# EAGLE board Print Panel (EAGLE 9.6.1)
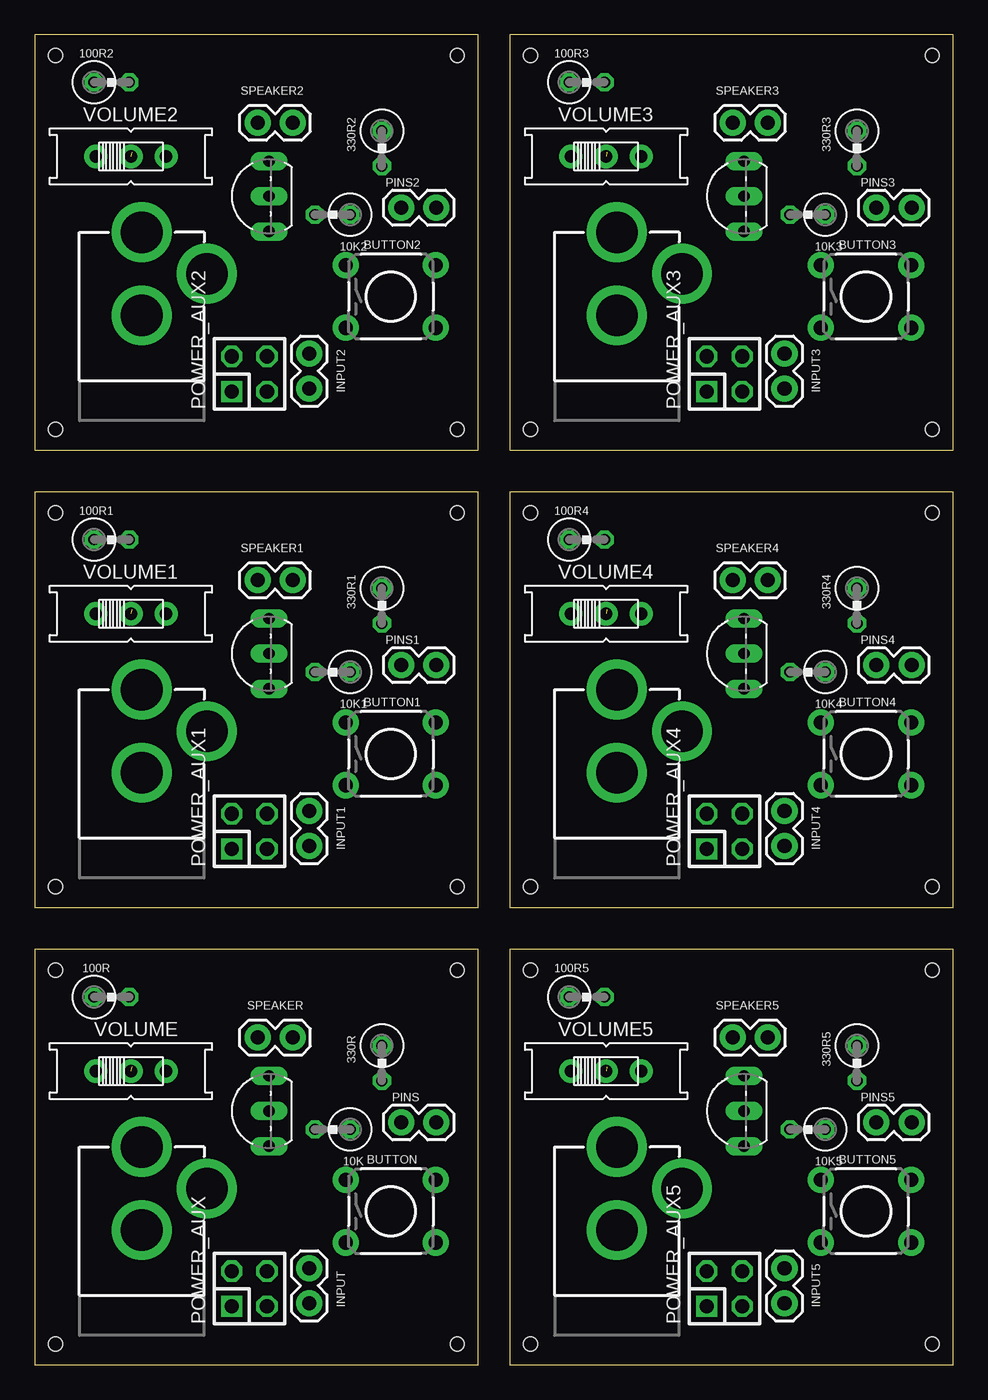
[diagram p0: board, top side]
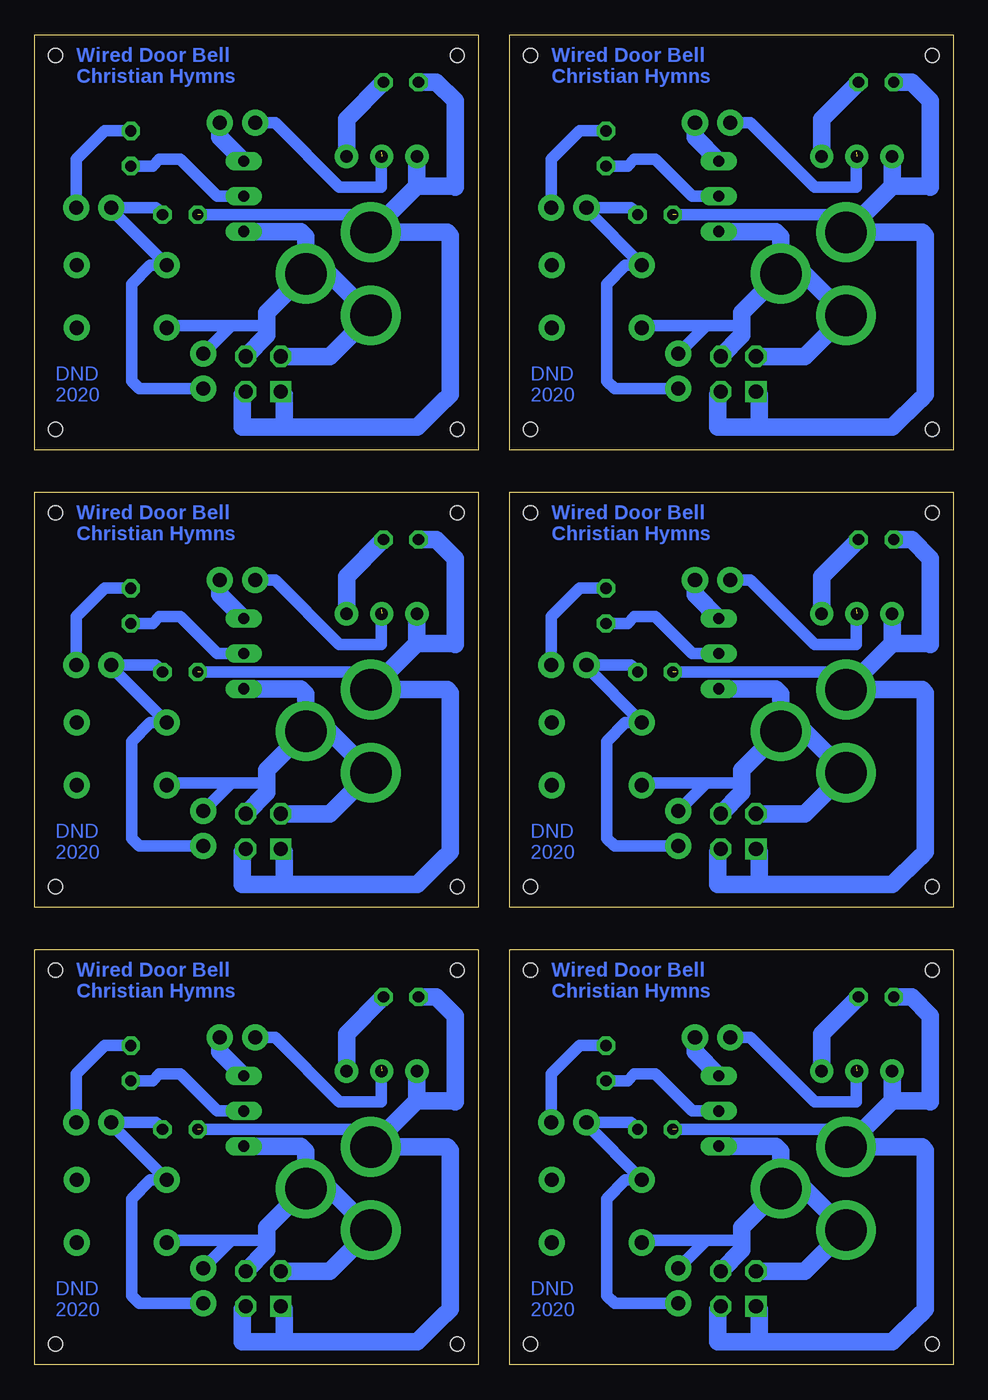
[diagram p1: board, bottom side, seen from below]

Size 66.29 x 96.04 mm. Coordinates in mm from the lower left corner, seen from the top.
Outline: 0,0 32,0 32,30 0,30 0,0
Outline: 0,33.02 32,33.02 32,63.02 0,63.02 0,33.02
Outline: 0,66.04 32,66.04 32,96.04 0,96.04 0,66.04
Outline: 34.29,66.04 66.29,66.04 66.29,96.04 34.29,96.04 34.29,66.04
Outline: 34.29,33.02 66.29,33.02 66.29,63.02 34.29,63.02 34.29,33.02
Outline: 34.29,0 66.29,0 66.29,30 34.29,30 34.29,0
Copper layers (1*16): Top 0.035mm / dielectric 1.5mm / Bottom 0.035mm
Design rules "default": minimum track width 6mil, minimum drill 0.35mm, track to track 6mil, track to pad 6mil, pad to pad 6mil, via to via 6mil, smd to smd 6mil, copper to edge 40mil, drill to drill 6mil, minimum pad ring 10mil, minimum via ring 8mil, stop-mask expansion 4mil, vias tented up to drill 0mil, thermal gap 10mil
Holes 1 mm at 1.5,1.5 30.5,28.5 30.5,1.5 1.5,28.5 1.5,34.52 30.5,61.52 30.5,34.52 1.5,61.52 1.5,67.54 30.5,94.54 30.5,67.54 1.5,94.54 35.79,67.54 64.79,94.54 64.79,67.54 35.79,94.54 35.79,34.52 64.79,61.52 64.79,34.52 35.79,61.52 35.79,1.5 64.79,28.5 64.79,1.5 35.79,28.5

## Footprints (pad centres in the part's own frame; a part is rotated, then mirrored left to right if it is on the bottom)
0309V = drill 0.813 octagon: 1 -1.27,0; 2 1.27,0
TACTILE_SWITCH_PTH_6.0MM = drill 1.016 pad 1.88: 1 -3.251,2.261; 2 3.251,2.261; 3 -3.251,-2.261; 4 3.251,-2.261
1X02 = drill 1.016 pad 1.88: 1 0,0; 2 2.54,0
POWER_JACK_PTH = drill 2.997 pad 4.318: GND 0,7.7; GNDBREAK 4.7,10.7; PWR 0,13.7
DIL-100-2X02 = drill 1.016 square: 1 -1.27,-1.27 | drill 1.016 octagon: 2 -1.27,1.27; 3 1.27,-1.27; 4 1.27,1.27
TO92-EBC-OVAL = drill 0.813 long: B 0,-1.27; C 2.54,-1.27; E -2.54,-1.27
EG1218 = drill 0.9 pad 1.676: O -2.54,0; P 0,0; S 2.54,0

## Placement (x,y rotation side)
10K  10k  [0309V]  21.5,17 180 top
10K1  10k  [0309V]  21.5,50.02 180 top
10K2  10k  [0309V]  21.5,83.04 180 top
10K3  10k  [0309V]  55.79,83.04 180 top
10K4  10k  [0309V]  55.79,50.02 180 top
10K5  10k  [0309V]  55.79,17 180 top
100R  100  [0309V]  5.56,26.56 0 top
100R1  100  [0309V]  5.56,59.58 0 top
100R2  100  [0309V]  5.56,92.6 0 top
100R3  100  [0309V]  39.85,92.6 0 top
100R4  100  [0309V]  39.85,59.58 0 top
100R5  100  [0309V]  39.85,26.56 0 top
330R  330  [0309V]  25.06,21.78 270 top
330R1  330  [0309V]  25.06,54.8 270 top
330R2  330  [0309V]  25.06,87.82 270 top
330R3  330  [0309V]  59.35,87.82 270 top
330R4  330  [0309V]  59.35,54.8 270 top
330R5  330  [0309V]  59.35,21.78 270 top
BUTTON  [TACTILE_SWITCH_PTH_6.0MM]  25.71,11.09 0 top
BUTTON1  [TACTILE_SWITCH_PTH_6.0MM]  25.71,44.11 0 top
BUTTON2  [TACTILE_SWITCH_PTH_6.0MM]  25.71,77.13 0 top
BUTTON3  [TACTILE_SWITCH_PTH_6.0MM]  60,77.13 0 top
BUTTON4  [TACTILE_SWITCH_PTH_6.0MM]  60,44.11 0 top
BUTTON5  [TACTILE_SWITCH_PTH_6.0MM]  60,11.09 0 top
INPUT  [1X02]  19.83,4.44 90 top
INPUT1  [1X02]  19.83,37.46 90 top
INPUT2  [1X02]  19.83,70.48 90 top
INPUT3  [1X02]  54.12,70.48 90 top
INPUT4  [1X02]  54.12,37.46 90 top
INPUT5  [1X02]  54.12,4.44 90 top
PINS  [1X02]  29,17.5 180 top
PINS1  [1X02]  29,50.52 180 top
PINS2  [1X02]  29,83.54 180 top
PINS3  [1X02]  63.29,83.54 180 top
PINS4  [1X02]  63.29,50.52 180 top
PINS5  [1X02]  63.29,17.5 180 top
POWER  POWER_JACK  [POWER_JACK_PTH]  7.73,2.03 0 top
POWER1  POWER_JACK  [POWER_JACK_PTH]  7.73,35.05 0 top
POWER2  POWER_JACK  [POWER_JACK_PTH]  7.73,68.07 0 top
POWER3  POWER_JACK  [POWER_JACK_PTH]  42.02,68.07 0 top
POWER4  POWER_JACK  [POWER_JACK_PTH]  42.02,35.05 0 top
POWER5  POWER_JACK  [POWER_JACK_PTH]  42.02,2.03 0 top
POWER_AUX  F-2X02-DIL-100  [DIL-100-2X02]  15.5,5.5 0 top
POWER_AUX1  F-2X02-DIL-100  [DIL-100-2X02]  15.5,38.52 0 top
POWER_AUX2  F-2X02-DIL-100  [DIL-100-2X02]  15.5,71.54 0 top
POWER_AUX3  F-2X02-DIL-100  [DIL-100-2X02]  49.79,71.54 0 top
POWER_AUX4  F-2X02-DIL-100  [DIL-100-2X02]  49.79,38.52 0 top
POWER_AUX5  F-2X02-DIL-100  [DIL-100-2X02]  49.79,5.5 0 top
SPEAKER  [1X02]  18.63,23.63 180 top
SPEAKER1  [1X02]  18.63,56.65 180 top
SPEAKER2  [1X02]  18.63,89.67 180 top
SPEAKER3  [1X02]  52.92,89.67 180 top
SPEAKER4  [1X02]  52.92,56.65 180 top
SPEAKER5  [1X02]  52.92,23.63 180 top
T1  2N2222  [TO92-EBC-OVAL]  15.64,18.33 90 top
T2  2N2222  [TO92-EBC-OVAL]  15.64,51.35 90 top
T3  2N2222  [TO92-EBC-OVAL]  15.64,84.37 90 top
T4  2N2222  [TO92-EBC-OVAL]  49.93,84.37 90 top
T5  2N2222  [TO92-EBC-OVAL]  49.93,51.35 90 top
T6  2N2222  [TO92-EBC-OVAL]  49.93,18.33 90 top
VOLUME  [EG1218]  6.95,21.21 0 top
VOLUME1  [EG1218]  6.95,54.23 0 top
VOLUME2  [EG1218]  6.95,87.25 0 top
VOLUME3  [EG1218]  41.24,87.25 0 top
VOLUME4  [EG1218]  41.24,54.23 0 top
VOLUME5  [EG1218]  41.24,21.21 0 top

## Library data of the parts
10K 10K1-10K5 100R 100R1-100R5 330R 330R1-330R5 = rcl; SPICEPREFIX: R
BUTTON BUTTON1-BUTTON5 = SparkFun-Switches; PROD_ID: SWCH-08441; SF_SKU: COM-00097
INPUT INPUT1-INPUT5 PINS PINS1-PINS5 SPEAKER SPEAKER1-SPEAKER5 = SparkFun-Connectors
POWER POWER1-POWER5 = SparkFun-Connectors; PROD_ID: CONN-08197
POWER_AUX POWER_AUX1-POWER_AUX5 = con-headers-jp
T1-T6 VOLUME VOLUME1-VOLUME5 = adafruit

## Nets
5V: 10K.2 100R.1 POWER.PWR POWER_AUX.1 POWER_AUX.3 VOLUME.O
5V1: 10K1.2 100R1.1 POWER1.PWR POWER_AUX1.1 POWER_AUX1.3 VOLUME1.O
5V2: 10K2.2 100R2.1 POWER2.PWR POWER_AUX2.1 POWER_AUX2.3 VOLUME2.O
5V3: 10K3.2 100R3.1 POWER3.PWR POWER_AUX3.1 POWER_AUX3.3 VOLUME3.O
5V4: 10K4.2 100R4.1 POWER4.PWR POWER_AUX4.1 POWER_AUX4.3 VOLUME4.O
5V5: 10K5.2 100R5.1 POWER5.PWR POWER_AUX5.1 POWER_AUX5.3 VOLUME5.O
BTN_IN: 10K.1 BUTTON.1 INPUT.1 PINS.2
BTN_IN1: 10K1.1 BUTTON1.1 INPUT1.1 PINS1.2
BTN_IN2: 10K2.1 BUTTON2.1 INPUT2.1 PINS2.2
BTN_IN3: 10K3.1 BUTTON3.1 INPUT3.1 PINS3.2
BTN_IN4: 10K4.1 BUTTON4.1 INPUT4.1 PINS4.2
BTN_IN5: 10K5.1 BUTTON5.1 INPUT5.1 PINS5.2
GND: BUTTON.3 INPUT.2 POWER.GND POWER.GNDBREAK POWER_AUX.2 POWER_AUX.4 T1.E
GND1: BUTTON1.3 INPUT1.2 POWER1.GND POWER1.GNDBREAK POWER_AUX1.2 POWER_AUX1.4 T2.E
GND2: BUTTON2.3 INPUT2.2 POWER2.GND POWER2.GNDBREAK POWER_AUX2.2 POWER_AUX2.4 T3.E
GND3: BUTTON3.3 INPUT3.2 POWER3.GND POWER3.GNDBREAK POWER_AUX3.2 POWER_AUX3.4 T4.E
GND4: BUTTON4.3 INPUT4.2 POWER4.GND POWER4.GNDBREAK POWER_AUX4.2 POWER_AUX4.4 T5.E
GND5: BUTTON5.3 INPUT5.2 POWER5.GND POWER5.GNDBREAK POWER_AUX5.2 POWER_AUX5.4 T6.E
MIN: 100R.2 VOLUME.S
MIN1: 100R1.2 VOLUME1.S
MIN2: 100R2.2 VOLUME2.S
MIN3: 100R3.2 VOLUME3.S
MIN4: 100R4.2 VOLUME4.S
MIN5: 100R5.2 VOLUME5.S
SPK_GND: SPEAKER.1 T1.C
SPK_GND1: SPEAKER1.1 T2.C
SPK_GND2: SPEAKER2.1 T3.C
SPK_GND3: SPEAKER3.1 T4.C
SPK_GND4: SPEAKER4.1 T5.C
SPK_GND5: SPEAKER5.1 T6.C
SPK_PWM: 330R.1 PINS.1
SPK_PWM1: 330R1.1 PINS1.1
SPK_PWM2: 330R2.1 PINS2.1
SPK_PWM3: 330R3.1 PINS3.1
SPK_PWM4: 330R4.1 PINS4.1
SPK_PWM5: 330R5.1 PINS5.1
SPK_SIG: 330R.2 T1.B
SPK_SIG1: 330R1.2 T2.B
SPK_SIG2: 330R2.2 T3.B
SPK_SIG3: 330R3.2 T4.B
SPK_SIG4: 330R4.2 T5.B
SPK_SIG5: 330R5.2 T6.B
SPK_VOL: SPEAKER.2 VOLUME.P
SPK_VOL1: SPEAKER1.2 VOLUME1.P
SPK_VOL2: SPEAKER2.2 VOLUME2.P
SPK_VOL3: SPEAKER3.2 VOLUME3.P
SPK_VOL4: SPEAKER4.2 VOLUME4.P
SPK_VOL5: SPEAKER5.2 VOLUME5.P

## Tracks (layer width: path | path; a pad name or v marks a point on that pad's centre or on a via)
5V  (1 unrouted)
  Bottom 0.813: 3,26.56 3,26.35 | 20,17 18.09,17 18.07,17.01 9.01,17.01 POWER.PWR
  Bottom 1.27: 14,1.65 4.39,1.65 2.39,3.65 2.35,3.65 2,4 2,15.5 2.23,15.73 POWER.PWR 4.41,19.05 | 14,1.65 17,1.65 17,4 POWER_AUX.3 | 4.41,19.05 VOLUME.O | 4.41,19.05 1.7,19.05 | 1.7,19.05 1.65,19 | 1.7,19.05 1.65,19.11 1.65,25.21 3,26.56 100R.1 | 14,1.65 14,4 POWER_AUX.1
5V1  (1 unrouted)
  Bottom 0.813: 3,59.58 3,59.37 | 20,50.02 18.09,50.02 18.07,50.03 9.01,50.03 POWER1.PWR
  Bottom 1.27: 14,34.67 4.39,34.67 2.39,36.67 2.35,36.67 2,37.02 2,48.52 2.23,48.75 POWER1.PWR 4.41,52.07 | 14,34.67 17,34.67 17,37.02 POWER_AUX1.3 | 4.41,52.07 VOLUME1.O | 4.41,52.07 1.7,52.07 | 1.7,52.07 1.65,52.02 | 1.7,52.07 1.65,52.13 1.65,58.23 3,59.58 100R1.1 | 14,34.67 14,37.02 POWER_AUX1.1
5V2  (1 unrouted)
  Bottom 0.813: 3,92.6 3,92.39 | 20,83.04 18.09,83.04 18.07,83.05 9.01,83.05 POWER2.PWR
  Bottom 1.27: 14,67.69 4.39,67.69 2.39,69.69 2.35,69.69 2,70.04 2,81.54 2.23,81.77 POWER2.PWR 4.41,85.09 | 14,67.69 17,67.69 17,70.04 POWER_AUX2.3 | 4.41,85.09 VOLUME2.O | 4.41,85.09 1.7,85.09 | 1.7,85.09 1.65,85.04 | 1.7,85.09 1.65,85.15 1.65,91.25 3,92.6 100R2.1 | 14,67.69 14,70.04 POWER_AUX2.1
5V3  (1 unrouted)
  Bottom 0.813: 37.29,92.6 37.29,92.39 | 54.29,83.04 52.38,83.04 52.36,83.05 43.3,83.05 POWER3.PWR
  Bottom 1.27: 48.29,67.69 38.68,67.69 36.68,69.69 36.64,69.69 36.29,70.04 36.29,81.54 36.52,81.77 POWER3.PWR 38.7,85.09 | 48.29,67.69 51.29,67.69 51.29,70.04 POWER_AUX3.3 | 38.7,85.09 VOLUME3.O | 38.7,85.09 35.99,85.09 | 35.99,85.09 35.94,85.04 | 35.99,85.09 35.94,85.15 35.94,91.25 37.29,92.6 100R3.1 | 48.29,67.69 48.29,70.04 POWER_AUX3.1
5V4  (1 unrouted)
  Bottom 0.813: 37.29,59.58 37.29,59.37 | 54.29,50.02 52.38,50.02 52.36,50.03 43.3,50.03 POWER4.PWR
  Bottom 1.27: 48.29,34.67 38.68,34.67 36.68,36.67 36.64,36.67 36.29,37.02 36.29,48.52 36.52,48.75 POWER4.PWR 38.7,52.07 | 48.29,34.67 51.29,34.67 51.29,37.02 POWER_AUX4.3 | 38.7,52.07 VOLUME4.O | 38.7,52.07 35.99,52.07 | 35.99,52.07 35.94,52.02 | 35.99,52.07 35.94,52.13 35.94,58.23 37.29,59.58 100R4.1 | 48.29,34.67 48.29,37.02 POWER_AUX4.1
5V5  (1 unrouted)
  Bottom 0.813: 37.29,26.56 37.29,26.35 | 54.29,17 52.38,17 52.36,17.01 43.3,17.01 POWER5.PWR
  Bottom 1.27: 48.29,1.65 38.68,1.65 36.68,3.65 36.64,3.65 36.29,4 36.29,15.5 36.52,15.73 POWER5.PWR 38.7,19.05 | 48.29,1.65 51.29,1.65 51.29,4 POWER_AUX5.3 | 38.7,19.05 VOLUME5.O | 38.7,19.05 35.99,19.05 | 35.99,19.05 35.94,19 | 35.99,19.05 35.94,19.11 35.94,25.21 37.29,26.56 100R5.1 | 48.29,1.65 48.29,4 POWER_AUX5.1
BTN_IN
  Bottom 0.813: INPUT.1 24.44,4.44 25,5 25,12 23.65,13.35 BUTTON.1 26.46,17.35 PINS.2 23.27,17.5 10K.1
BTN_IN1
  Bottom 0.813: INPUT1.1 24.44,37.46 25,38.02 25,45.02 23.65,46.37 BUTTON1.1 26.46,50.37 PINS1.2 23.27,50.52 10K1.1
BTN_IN2
  Bottom 0.813: INPUT2.1 24.44,70.48 25,71.04 25,78.04 23.65,79.39 BUTTON2.1 26.46,83.39 PINS2.2 23.27,83.54 10K2.1
BTN_IN3
  Bottom 0.813: INPUT3.1 58.73,70.48 59.29,71.04 59.29,78.04 57.94,79.39 BUTTON3.1 60.75,83.39 PINS3.2 57.56,83.54 10K3.1
BTN_IN4
  Bottom 0.813: INPUT4.1 58.73,37.46 59.29,38.02 59.29,45.02 57.94,46.37 BUTTON4.1 60.75,50.37 PINS4.2 57.56,50.52 10K4.1
BTN_IN5
  Bottom 0.813: INPUT5.1 58.73,4.44 59.29,5 59.29,12 57.94,13.35 BUTTON5.1 60.75,17.35 PINS5.2 57.56,17.5 10K5.1
GND
  Bottom 0.813: 15.24,9 17.81,9 | 17.81,9 INPUT.2 | 17.81,9 22.29,9 BUTTON.3
  Bottom 1.27: POWER.GNDBREAK 10.73,12.73 POWER.GND 10.69,6.77 POWER_AUX.2 | POWER.GNDBREAK 15.24,9.92 15.24,9 15.24,8.3 POWER_AUX.4 | POWER.GNDBREAK 12.43,15.41 12.79,15.79 T1.E
GND1
  Bottom 0.813: 15.24,42.02 17.81,42.02 | 17.81,42.02 INPUT1.2 | 17.81,42.02 22.29,42.02 BUTTON1.3
  Bottom 1.27: POWER1.GNDBREAK 10.73,45.75 POWER1.GND 10.69,39.79 POWER_AUX1.2 | POWER1.GNDBREAK 15.24,42.94 15.24,42.02 15.24,41.32 POWER_AUX1.4 | POWER1.GNDBREAK 12.43,48.43 12.79,48.81 T2.E
GND2
  Bottom 0.813: 15.24,75.04 17.81,75.04 | 17.81,75.04 INPUT2.2 | 17.81,75.04 22.29,75.04 BUTTON2.3
  Bottom 1.27: POWER2.GNDBREAK 10.73,78.77 POWER2.GND 10.69,72.81 POWER_AUX2.2 | POWER2.GNDBREAK 15.24,75.96 15.24,75.04 15.24,74.34 POWER_AUX2.4 | POWER2.GNDBREAK 12.43,81.45 12.79,81.83 T3.E
GND3
  Bottom 0.813: 49.53,75.04 52.1,75.04 | 52.1,75.04 INPUT3.2 | 52.1,75.04 56.58,75.04 BUTTON3.3
  Bottom 1.27: POWER3.GNDBREAK 45.02,78.77 POWER3.GND 44.98,72.81 POWER_AUX3.2 | POWER3.GNDBREAK 49.53,75.96 49.53,75.04 49.53,74.34 POWER_AUX3.4 | POWER3.GNDBREAK 46.72,81.45 47.08,81.83 T4.E
GND4
  Bottom 0.813: 49.53,42.02 52.1,42.02 | 52.1,42.02 INPUT4.2 | 52.1,42.02 56.58,42.02 BUTTON4.3
  Bottom 1.27: POWER4.GNDBREAK 45.02,45.75 POWER4.GND 44.98,39.79 POWER_AUX4.2 | POWER4.GNDBREAK 49.53,42.94 49.53,42.02 49.53,41.32 POWER_AUX4.4 | POWER4.GNDBREAK 46.72,48.43 47.08,48.81 T5.E
GND5
  Bottom 0.813: 49.53,9 52.1,9 | 52.1,9 INPUT5.2 | 52.1,9 56.58,9 BUTTON5.3
  Bottom 1.27: POWER5.GNDBREAK 45.02,12.73 POWER5.GND 44.98,6.77 POWER_AUX5.2 | POWER5.GNDBREAK 49.53,9.92 49.53,9 49.53,8.3 POWER_AUX5.4 | POWER5.GNDBREAK 46.72,15.41 47.08,15.79 T6.E
MIN
  Bottom 1.27: 100R.2 9.49,23.9 VOLUME.S
MIN1
  Bottom 1.27: 100R1.2 9.49,56.92 VOLUME1.S
MIN2
  Bottom 1.27: 100R2.2 9.49,89.94 VOLUME2.S
MIN3
  Bottom 1.27: 100R3.2 43.78,89.94 VOLUME3.S
MIN4
  Bottom 1.27: 100R4.2 43.78,56.92 VOLUME4.S
MIN5
  Bottom 1.27: 100R5.2 43.78,23.9 VOLUME5.S
SPK_GND
  Bottom 1.27: T1.C 18.63,22.59 SPEAKER.1
SPK_GND1
  Bottom 1.27: T2.C 18.63,55.61 SPEAKER1.1
SPK_GND2
  Bottom 1.27: T3.C 18.63,88.63 SPEAKER2.1
SPK_GND3
  Bottom 1.27: T4.C 52.92,88.63 SPEAKER3.1
SPK_GND4
  Bottom 1.27: T5.C 52.92,55.61 SPEAKER4.1
SPK_GND5
  Bottom 1.27: T6.C 52.92,22.59 SPEAKER5.1
SPK_PWM
  Bottom 0.813: PINS.1 29,21 26.95,23.05 330R.1
SPK_PWM1
  Bottom 0.813: PINS1.1 29,54.02 26.95,56.07 330R1.1
SPK_PWM2
  Bottom 0.813: PINS2.1 29,87.04 26.95,89.09 330R2.1
SPK_PWM3
  Bottom 0.813: PINS3.1 63.29,87.04 61.24,89.09 330R3.1
SPK_PWM4
  Bottom 0.813: PINS4.1 63.29,54.02 61.24,56.07 330R4.1
SPK_PWM5
  Bottom 0.813: PINS5.1 63.29,21 61.24,23.05 330R5.1
SPK_SIG
  Bottom 0.813: 330R.2 23.49,20.51 23,21 21.5,21 18.83,18.33 T1.B
SPK_SIG1
  Bottom 0.813: 330R1.2 23.49,53.53 23,54.02 21.5,54.02 18.83,51.35 T2.B
SPK_SIG2
  Bottom 0.813: 330R2.2 23.49,86.55 23,87.04 21.5,87.04 18.83,84.37 T3.B
SPK_SIG3
  Bottom 0.813: 330R3.2 57.78,86.55 57.29,87.04 55.79,87.04 53.12,84.37 T4.B
SPK_SIG4
  Bottom 0.813: 330R4.2 57.78,53.53 57.29,54.02 55.79,54.02 53.12,51.35 T5.B
SPK_SIG5
  Bottom 0.813: 330R5.2 57.78,20.51 57.29,21 55.79,21 53.12,18.33 T6.B
SPK_VOL  (1 unrouted)
  Bottom 0.813: SPEAKER.2 14.63,23.63 10,19 7,19 7,21.5
SPK_VOL1  (1 unrouted)
  Bottom 0.813: SPEAKER1.2 14.63,56.65 10,52.02 7,52.02 7,54.52
SPK_VOL2  (1 unrouted)
  Bottom 0.813: SPEAKER2.2 14.63,89.67 10,85.04 7,85.04 7,87.54
SPK_VOL3  (1 unrouted)
  Bottom 0.813: SPEAKER3.2 48.92,89.67 44.29,85.04 41.29,85.04 41.29,87.54
SPK_VOL4  (1 unrouted)
  Bottom 0.813: SPEAKER4.2 48.92,56.65 44.29,52.02 41.29,52.02 41.29,54.52
SPK_VOL5  (1 unrouted)
  Bottom 0.813: SPEAKER5.2 48.92,23.63 44.29,19 41.29,19 41.29,21.5

## Text on the board
Bottom: Wired Door Bell / Christian Hymns | Wired Door Bell / Christian Hymns | DND / 2020 | DND / 2020 | Wired Door Bell / Christian Hymns | Wired Door Bell / Christian Hymns | DND / 2020 | DND / 2020 | Wired Door Bell / Christian Hymns | Wired Door Bell / Christian Hymns | DND / 2020 | DND / 2020